# Altium PCB sitara_rev3b.PcbDoc (part 3 of 3)
Units mil, origin at the board's own origin, x right, y up, seen from the top; angles counter-clockwise.
Board outline 1650 x 2400 mil, 4 copper layers (Top Layer, Internal Plane 1, Internal Plane 2, Bottom Layer), stack 60.8 mil thick; 109 components, 83 nets, 387 pads, 306 vias.
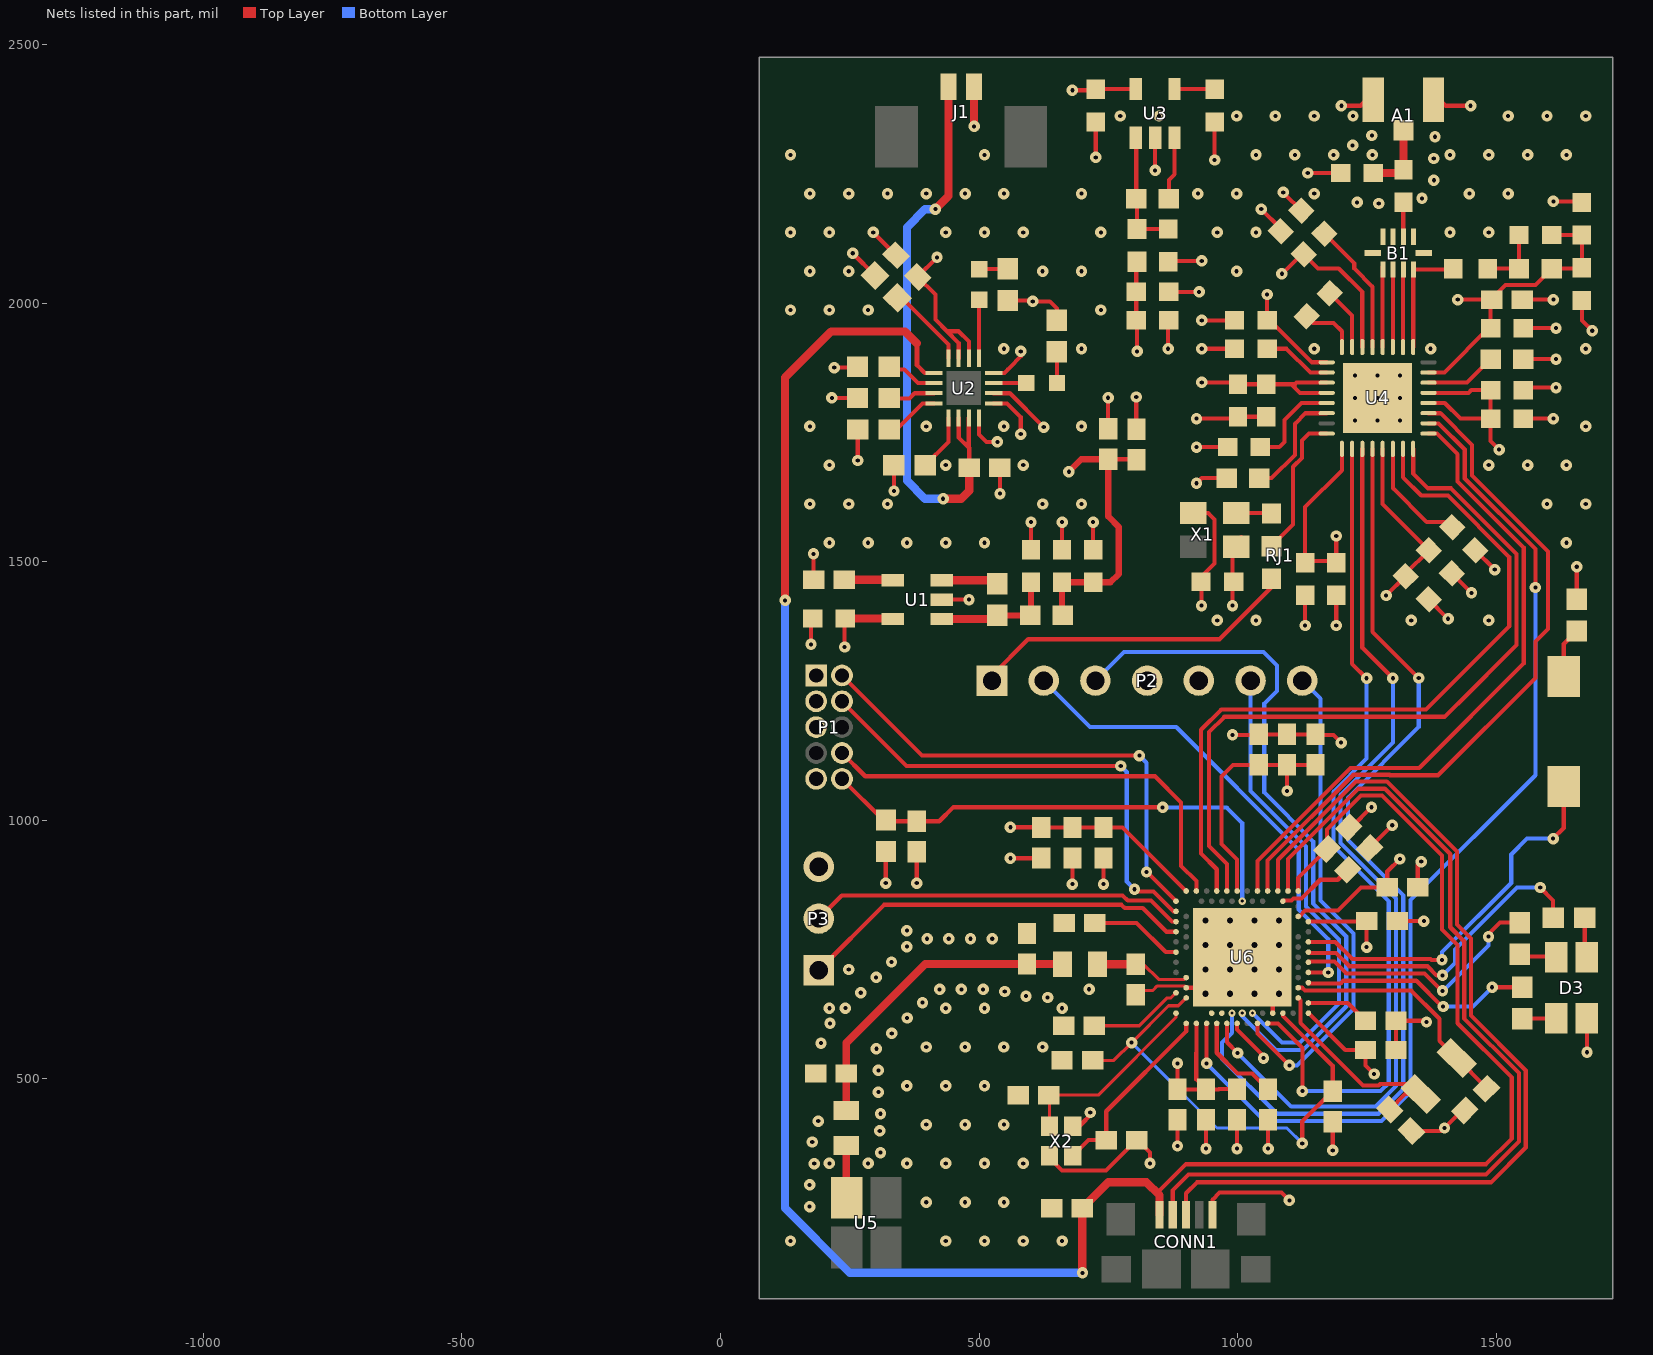
[diagram p4: the nets of this part, all layers, seen from the top]

## Via types
v1: diameter 22, hole 8, Top Layer to Bottom Layer, tented both sides, 274 vias
v2: diameter 24, hole 12, Top Layer to Bottom Layer, 16 vias
v3: diameter 19.68, hole 7.87, Top Layer to Bottom Layer, 10 vias
v4: diameter 14, hole 6, Top Layer to Bottom Layer, tented top, 4 vias
v5: diameter 113, hole 113, Top Layer to Bottom Layer, 2 vias

## Nets (pads, with @x,y where several pads share a name; then routed paths per layer and width w, separated by ;. In a path a pad name is that pad's centre, name@x,y a point inside that pad or via, vN(x,y) a via of type N, cw(c..) or ccw(c..) an arc to the next point about the centre after c; other vN are vias at no path point)
CHFILT_0: U6.B17
CHFILT_1: U4.4 U6.B15 | length 1886.1
  Top Layer w8: U4.4@1260.66,1718.07 1260.66,1364.34 v1(1350,1275)
  Bottom Layer w8: v4(989.08,626.97) 989.08,589.08 970,570 970,538.45 1075.95,432.5 1272.06,432.5 1320.22,480.67 1320.22,854.57 1213,961.8 1213,1043.4 1350,1180.4 v1(1350,1275)
CLK1: P2.1 RJ1.1 | length 637.6
  Top Layer w8: P2.1@525,1270 525,1280 595,1350 965,1350 1065.5,1450.5 RJ1.1@1065.5,1467.01
D1_N: CONN1.2 U6.AD4 | length 1850.1
  Top Layer w8: CONN1.2@874.41,237.66 874.41,284.41 905,315 1479.8,315 1544,379.2 1544,511 1438,617 1438,766.12 1411.02,793.1 1411.02,934.38 1284.4,1061 1233.36,1061 1097.35,924.99 U6.AD4@1097.35,863.19
D1_P: CONN1.3 U6.AD6 | length 1888.1
  Top Layer w8: CONN1.3@900,237.66 900,278.82 921.18,300 1490,300 1557,367 1557,516.38 1451,622.38 1451,771.51 1424.02,798.49 1424.02,939.77 1289.78,1074 1289.18,1074 1288.18,1075 1228.98,1075 1077.67,923.69 U6.AD6@1077.67,863.19
GND: A1.2 A1.3 B1.5 B1.6 B1.8 B1.9 B1.10 C1.1 C2.1 C3.1 C4.1 C5.1 C6.1 C7.1 C8.1 C9.1 C10.1 C11.1 C12.1 C13.1 C14.1 C15.1 C16.2 C17.2 C18.1 C19.2 C20.1 C21.1 C22.1 C23.2 C25.1 C26.1 C28.1 C29.1 C31.2 C32.1 C33.1 C34.2 C35.2 C36.2 C37.1 C38.2 C39.2 C40.1 C41.1 C42.1 C43.1 C44.1 C45.2 C46.1 C47.1 C48.1 C49.1 C50.2 C51.1 C52.1 C53.1 C54.1 C55.1 C56.1 C57.1 C58.1 C59.1 C60.1 C61.1 C62.1 C63.1 C64.1 C65.1 C66.1 CONN1.5 J1.2 P1.3 P1.5 P1.9 P2.5 P3.3 R3.1 R4.1 R5.1 R7.2 R8.1 R12.1 R14.1 R15.1 U1.2 U2.4 U2.6 U2.8 U3.2 U4.33 U6.74 U6.B7 U6.F23 X1.2 X2.2 X2.4 | length 5254.8
  Top Layer w6: C49.1@809.92,670.47 835.47,670.47 844.76,679.76 896.93,679.76 U6.F23@900.5,676.19
  Top Layer w8: v1(175,1340) 175,1386.5 C5.1@178.5,1390 ; v1(180,1515) 180,1465.47 C4.1@180.47,1465 ; v1(215.5,1816.5) 264.48,1816.5 R4.1@265.5,1815.48 ; v1(220,1875) 264.51,1875 R3.1@264.99,1875.48 ; v1(265.5,1695.48) R5.1@265.5,1755.48 ; v1(295.5,2136.5) C7.1@339.62,2092.38 ; R7.2@298.92,2053.07 v1(255.76,2096.24) ; R8.1@334.99,1686.5 335.5,1685.99 v1(335.5,1636.5) ; v1(379.5,878.5) C63.1@379.5,938.97 ; U1.2@427.74,1426.5 v1(480.5,1426.5) ; v1@490.11,2341.89 v1(490.5,2341.5) ; U2.4@500.03,1777.8 500.03,1745.95 514.48,1731.5 v1(535.5,1731.5) ; U2.8@528.18,1865 549.03,1865 559.5,1875.48 ; U2.6@528.33,1825.48 U2.6@528.18,1825.63 559.37,1825.63 v1(625,1760) ; C6.1@540.03,1681.5 540.5,1681.03 v1(540.5,1631.5) ; 555.1,1871.08 559.5,1875.48 ; v1(560.5,926.5) 620.03,926.5 C53.1@620.5,926.97 ; v1(580.5,1906.5) 580.5,1896.48 559.5,1875.48 ; C64.1@600.5,1523 v1(600.5,1576.5) ; X2.2@631.83,351.25 660.53,322.55 745.32,322.55 804.65,381.88 805.4,382.63 830.5,357.53 v1(830.5,336.5) ; C65.1@660.5,1523 v1(660.5,1576.5) ; C50.2@665.5,801.03 C50.2@665.97,801.5 ; v1(680.5,876.5) C57.1@680.5,926.97 ; X2.4@681.41,408.34 693.73,408.34 720.39,435 v1(715,435) ; C66.1@720.5,1523 v1(720.5,1576.5) ; v1(725.5,2281.5) C11.1@725.5,2350 C11.1@725.5,2355 ; v1(740.5,876.5) C59.1@740.5,926.97 ; C2.1@749.64,1756.89 v1(749.64,1816.86) ; C1.1@804.04,1760.42 v1(804.04,1818.32) ; v1(840.5,2256.5) U3.2@840.5,2319.26 ; v1(865.5,1911.5) 865.5,1960 C8.1@867,1961.5 ; C9.1@867,2021.5 v1(925.5,2021.5) ; C10.1@870.5,2080 872,2081.5 v1(930.5,2081.5) ; v1(883.77,370.24) C60.1@883.77,420.71 C60.1@883.77,435.71 ; U6.F23@900.5,676.19 949.71,676.19 v2(985.15,711.62) U6.74@1008.77,735.24 1067.82,676.19 U6.B7@1067.82,626.97 ; v1(920.5,1651.5) 930.5,1661.5 R12.1@979,1661.5 ; v1(920.5,1721.5) C19.2@980.5,1721.5 ; v1(920.5,1776.5) 997,1776.5 C17.2@1000.5,1780 C16.2@1055.5,1780 ; v1(930.5,1911.5) C18.1@994,1911.5 ; v1(930.5,1966.5) C20.1@994,1966.5 ; v1@933.77,370.24 v1(938.77,365.24) C41.1@938.77,420.71 C41.1@938.77,430.71 ; CONN1.5@951.18,237.66 951.18,266.18 965,280 1085,280 v1(1100,265) ; v1(955.5,2276.5) C15.1@955.5,2350 ; v1(990,1165) 1039.47,1165 C62.1@1040.5,1166.03 C58.1@1095.5,1166.03 1145,1166.03 1146.03,1165 1185,1165 v1(1200,1150) ; v1(990,1415) 990,1531.04 X1.2@1006.84,1547.88 ; v1(998.77,365.24) C61.1@998.77,400.71 ; v1(1045.5,2181.5) 1083.23,2143.77 C22.1@1083.23,2138.77 ; v1(1058.77,365.24) C38.2@1058.77,420.71 ; v1(1088,2214) C23.2@1125.96,2176.04 ; v1(1130.5,1376.5) C14.1@1130.5,1435 C14.1@1130.5,1445 ; v1(1135.5,2251.5) 1197.51,2251.5 C29.1@1199,2250 ; v1(1183.77,361.74) C37.1@1183.77,417.21 ; v1(1190.5,1376.5) C25.1@1190.5,1435 C25.1@1190.5,1445 ; v1(1200.5,2381.5) 1237.97,2381.5 A1.2@1251.47,2395 ; C56.1@1214.65,986.12 1219.65,986.12 v1(1258.77,1025.24) ; C52.1@1254.65,946.12 v1(1298.77,990.24) ; C43.1@1306.22,555.74 C42.1@1306.22,612.31 1362.69,612.31 v1(1365,610) ; C51.1@1308.77,805.24 1309.01,805 v1(1360,805) ; C40.1@1335.88,399.12 1394.12,399.12 v1(1400,405) 1434.12,439.12 C44.1@1439.12,439.12 ; C54.1@1348.3,870.24 1348.3,913.3 v1(1355,920) ; C13.1@1369.24,1427.22 v1(1406.97,1389.5) ; A1.3@1388.72,2395 1402.22,2381.5 v1(1450.5,2381.5) v1@1449,2380 ; C26.1@1414.24,1472.22 C26.1@1414.24,1477.23 v1(1451.97,1439.5) ; C28.1@1459.24,1522.22 v1(1496.97,1484.5) ; C35.2@1552,1776.5 1557,1771.5 1562,1776.5 v1(1610.5,1776.5) ; C34.2@1552,1831.5 1557,1836.5 v1(1615.5,1836.5) ; R14.1@1552,1891.5 v1(1615.5,1891.5) ; C31.2@1552,1951.5 v1(1615.5,1951.5) ; C12.1@1552,2006.5 v1(1610.5,2006.5) ; v1(1610.5,2196.5) 1663.49,2196.5 C33.1@1665.5,2194.49 ; R15.1@1655.5,1427.01 v1(1655.5,1490) ; C32.1@1665.5,2005 1670.5,2000 1665.5,1995 1665.5,1966.5 v1(1685.5,1946.5) ; v1(255.76,2096.24) 260.76,2101.24 v1(255.76,2096.24)
  Top Layer w16: v1@490.11,2341.89 490.11,2375 J1.2@490.11,2417.96
  other v1: 135.5,186.5 435.5,186.5 510.5,186.5 585.5,186.5 660.5,186.5 172.35,253.07 398,261.5 473,261.5 548,261.5 172.35,295.07 181.33,336.1 210.5,336.5 285.5,336.5 360.5,336.5 435.5,336.5 510.5,336.5 585.5,336.5 309.34,357.37 177.42,377.91 308.04,399.35 398,411.5 473,411.5 548,411.5 189.19,418.23 309.34,432.58 305.24,474.38 360.5,486.5 435.5,486.5 510.5,486.5 305.33,516.38 301.51,558.2 398,561.5 473,561.5 548,561.5 623,561.5 194.3,569.05 331.21,587.9 211.9,607.18 360.91,617.6 210.5,636.5 241.6,636.88 435.5,636.5 510.5,636.5 660.5,636.5 390.61,647.3 632.58,657.24 590.67,659.95 271.3,666.58 549.66,669.02 423.85,672.97 465.85,672.97 507.85,672.97 712.84,673.15 301,696.28 248,711.5 330.7,725.98 360.39,755.68 399.51,770.97 441.51,770.97 483.51,770.97 525.51,770.97 360.5,786.5 960.5,1386.5 1035.5,1386.5 1335.5,1386.5 1485.5,1386.5 210.5,1536.5 285.5,1536.5 360.5,1536.5 435.5,1536.5 510.5,1536.5 1635.5,1536.5 173,1611.5 248,1611.5 323,1611.5 623,1611.5 698,1611.5 1598,1611.5 1673,1611.5 210.5,1686.5 435.5,1686.5 585.5,1686.5 1485.5,1686.5 1560.5,1686.5 1635.5,1686.5 173,1761.5 398,1761.5 548,1761.5 698,1761.5 1673,1761.5 548,1911.5 698,1911.5 1148,1911.5 1373,1911.5 1673,1911.5 135.5,1986.5 210.5,1986.5 285.5,1986.5 735.5,1986.5 173,2061.5 248,2061.5 623,2061.5 698,2061.5 998,2061.5 135.5,2136.5 210.5,2136.5 435.5,2136.5 510.5,2136.5 585.5,2136.5 735.5,2136.5 960.5,2136.5 1035.5,2136.5 1410.5,2136.5 1485.5,2136.5 1272.87,2192.43 1230.92,2194.53 1356.27,2202.4 173,2211.5 248,2211.5 323,2211.5 398,2211.5 473,2211.5 548,2211.5 698,2211.5 923,2211.5 998,2211.5 1148,2211.5 1448,2211.5 1523,2211.5 1379.33,2237.5 1379.2,2279.5 135.5,2286.5 510.5,2286.5 1035.5,2286.5 1110.5,2286.5 1185.5,2286.5 1260.5,2286.5 1410.5,2286.5 1485.5,2286.5 1560.5,2286.5 1635.5,2286.5 1222.17,2304.68 1381.54,2321.43 1259.46,2324 773,2361.5 848,2361.5 998,2361.5 1073,2361.5 1148,2361.5 1223,2361.5 1523,2361.5 1598,2361.5 1673,2361.5
  other v2: 937.9,664.37 985.15,664.37 1032.39,664.37 1079.63,664.37 937.9,711.62 1032.39,711.62 1079.63,711.62 937.9,758.86 985.15,758.86 1032.39,758.86 1079.63,758.86 937.9,806.11 985.15,806.11 1032.39,806.11 1079.63,806.11
  other v3: 1227.19,1773.19 1270.5,1773.19 1313.81,1773.19 1227.19,1816.5 1270.5,1816.5 1313.81,1816.5 1227.19,1859.81 1270.5,1859.81 1313.81,1859.81
GPIO0_0: U6.B19
GPIO0_1: U4.10 U6.A20 | length 2030.3
  Top Layer w8: U6.A20@939.87,607.29 939.87,530.13 v1(940,530) ; U4.10@1368.93,1767.29 1388.21,1767.29 1439,1716.5 1439,1660.8 1575.5,1524.3 v1(1575.5,1450)
  Bottom Layer w8: v1(940,530) 1051.5,418.5 1277.86,418.5 1334.22,474.87 1334.22,845.72 1575.5,1087 v1(1575.5,1450)
LED_B: R18.2 U6.N1 | length 621.6
  Top Layer w8: U6.N1@1136.72,745.08 1138.56,743.24 1190.37,743.24 1215.84,717.77 1367.03,717.77 1384.8,700 v1(1396.11,700) ; v1(1585,870) 1609.99,845.01 R18.2@1609.99,811.5
  Bottom Layer w8: v1(1396.11,700) 1420,723.89 1420,750.2 1539.8,870 v1(1585,870)
LED_G: R17.2 U6.L1 | length 505.5
  Top Layer w8: U6.L1@1136.72,725.4 1138.04,726.71 1187.09,726.71 1210.04,703.77 1361.23,703.77 1395,670 v1(1396.11,670) ; v1(1485,775) 1485,780 1507.01,802.01 R17.2@1545.5,802.01 R17.2@1550.5,802.01
  Bottom Layer w8: v1(1396.11,670) 1397.22,670 1485,757.78 v1(1485,775)
LED_R: R16.1 U6.G1 | length 454.6
  Top Layer w8: U6.G1@1136.72,686.03 1138.04,684.71 1199.19,684.71 1204.24,689.77 1345.23,689.77 1395,640 v1(1397.22,640) v1@1397.22,637.78 ; v1(1492.01,677.01) R16.1@1550.5,677.01
  Bottom Layer w8: v1(1397.22,640) 1455,640 v1(1492.01,677.01)
MAGN_0: U6.A14 | length 88.4
  Top Layer w8: U6.A14@998.93,607.29 998.93,595.48 1050,544.41 v1(1050,540)
MAGN_1: U4.3 U6.A16 | length 1773.8
  Top Layer w8: U6.A16@979.24,607.29 979.24,570.76 v1(1000,550) ; U4.3@1240.97,1718.07 1240.97,1333.56 v1(1300,1274.53)
  Bottom Layer w8: v1(1000,550) 1103.5,446.5 1266.26,446.5 1306.22,486.46 1306.22,848.78 1199,956 1199,1049.2 1300,1150.2 v1(1300,1274.53)
NetA1_1: A1.1 C27.2 C29.2 | length 137
  Top Layer w15: C29.2@1262,2251.5 C27.2@1314,2251.5 ; C27.2@1320.5,2258 A1.1@1320.5,2333.83
  Top Layer w22.84: C27.2@1314,2251.5 C27.2@1320.5,2258
NetB1_1: B1.1 U4.20 | length 165.1
  Top Layer w8: U4.20@1280.34,1914.93 1280.34,2070 B1.1@1280.36,2065 ; B1.1@1280.93,2065 B1.1@1280.97,2070
NetB1_2: B1.2 U4.19 | length 151
  Top Layer w8: U4.19@1300.03,1914.93 1300.03,2064.37 B1.2@1300.66,2065 ; B1.2@1300.03,2069.37 B1.2@1300.03,2070
NetB1_3: B1.3 U4.18 | length 158.7
  Top Layer w8: U4.18@1319.71,1914.93 1319.71,2064.37 B1.3@1320.34,2065 B1.3@1320.34,2056.66
NetB1_4: B1.4 L1.2 U4.17 | length 228.2
  Top Layer w8: U4.17@1339.4,1914.93 1339.4,2064.37 B1.4@1340.03,2065 1415.74,2065 L1.2@1417.23,2066.5
NetB1_7: B1.7 C27.1 | length 57.1
  Top Layer w9: B1.7@1320.34,2133 1320.34,2188.35 C27.1@1320.34,2189.85
  Top Layer w16.4: C27.1@1320.34,2188.35 C27.1@1320.5,2188.51
NetC4_2: C4.2 U1.4 | length 94.2
  Top Layer w8: U1.4@332.16,1465 U1.4@333.26,1463.9
  Top Layer w16: C4.2@239.53,1465 U1.4@332.16,1465
NetC6_2: C6.2 J1.1 U2.2 U2.3 | length 1145.2
  Top Layer w8: U2.2@460.66,1777.8 460.66,1739.93 480.11,1720.48 ; U2.3@480.11,1777.56 480.11,1720.48 ; C6.2@480.97,1690.48 480.97,1719.61 480.11,1720.48
  Top Layer w16: v1(415.5,2181.5) 440.89,2206.89 J1.1@440.89,2417.96 ; v1(430.5,1621.5) 465.5,1621.5 480.97,1636.97 C6.2@480.97,1681.5
  Bottom Layer w16: v1(415.5,2181.5) 395.5,2181.5 360.5,2146.5 360.5,1656.5 395.5,1621.5 v1(430.5,1621.5)
NetC10_2: C10.2 FB1.2 R11.2 U3.1 | length 227.3
  Top Layer w8: U3.1@803.1,2319.26 U3.1@804,2318.35 ; U3.1@804,2303.35 804,2206.5 805.5,2205 805.5,2186.5 FB1.2@805.5,2143 C10.2@865.5,2143 C10.2@870.5,2143
NetC15_2: C15.2 U3.4 | length 77.9
  Top Layer w8: U3.4@877.9,2413.74 954.75,2413.74 C15.2@955.5,2413
NetC18_2: C18.2 U4.26 | length 134
  Top Layer w8: C18.2@1057,1911.5 1094.71,1911.5 1140.5,1865.71 U4.26@1172.07,1865.71
NetC19_1: C19.1 U4.29 | length 188.7
  Top Layer w8: C19.1@1043.49,1721.5 1080.5,1721.5 1090.5,1731.5 1090.5,1773.87 1123.28,1806.66 U4.29@1172.07,1806.66
NetC23_1: C23.1 U4.21 | length 257.8
  Top Layer w8: C23.1@1167.77,2134.23 1225.5,2076.5 1225.5,2066.5 1260.66,2031.34 U4.21@1260.66,1914.93
NetC24_1: C24.1 U4.23 | length 132.1
  Top Layer w8: C24.1@1167.77,2018.77 C24.1@1177.77,2018.77 1178.23,2018.77 1221.29,1975.71 U4.23@1221.29,1914.93
NetC24_2: C24.2 U4.24 | length 120.8
  Top Layer w8: C24.2@1123.23,1974.23 C24.2@1133.23,1974.23 1145.96,1961.5 1185.5,1961.5 1201.6,1945.4 U4.24@1201.6,1914.93
NetC28_2: C28.2 U4.6 | length 221.9
  Top Layer w8: U4.6@1300.03,1718.07 1300.03,1641.97 1365.5,1576.5 1404.97,1576.5 C28.2@1414.7,1566.77
NetC30_2: C30.2 L1.1 R13.2 | length 125.2
  Top Layer w8: L1.1@1483.77,2066.5 R13.2@1544,2066.5 C30.2@1544,2131.5
NetC36_1: C36.1 U6.A23 X2.3 | length 366.9
  Top Layer w8: X2.3@681.41,351.25 711.66,381.5 C36.1@745.97,381.5 745.97,437.44 900.5,591.97 U6.A23@900.5,607.29
NetC37_2: C37.2 C45.1 U6.B5 U6.D23 | length 957.6
  Top Layer w6: C45.1@719.53,535.69 760.7,535.69 v1(795,569.98) 866.4,641.39 885.39,641.39 U6.D23@900.5,656.5
  Top Layer w8: U6.B5@1087.51,626.97 1087.51,621.5 1183.77,525.24 C37.2@1183.77,476.27 1124.77,417.27 v1(1124.77,375.19)
  Bottom Layer w6: v1(795,569.98) 959.98,405 1094.95,405 v1(1124.77,375.19)
NetC38_1: C38.1 U6.A18 | length 185.3
  Top Layer w8: U6.A18@959.56,607.29 959.56,550.44 999.56,510.44 1028.1,510.44 C38.1@1058.77,479.77
NetC39_1: C39.1 U6.B24 X2.1 | length 376.8
  Top Layer w6: X2.1@636.13,408.34 636.13,467.49 C39.1@635.03,468.59 730.5,468.59 880.81,618.9 U6.B24@880.81,626.97
NetC40_2: C40.2 U6.D2 X3.1 | length 413.7
  Top Layer w8: U6.D2@1117.04,656.5 1121.61,651.93 1121.61,608.39 1242.59,487.41 1272.88,487.41 1275.47,490 1334.41,490 X3.1@1353.97,470.44 1323.68,470.44 C40.2@1294.12,440.88
NetC42_2: C42.2 U6.C1 | length 124.7
  Top Layer w8: U6.C1@1136.72,646.66 1212.82,646.66 C42.2@1247.17,612.31
NetC44_2: C44.2 U6.F2 X3.2 | length 470.7
  Top Layer w8: U6.F2@1117.04,676.19 1124.77,676.19 1130.34,670.61 1335.5,670.61 1387,619.11 1390,616.11 1390,573.61 X3.2@1423.57,540.04 1480.88,482.73 C44.2@1480.88,480.88
NetC46_2: C46.2 U6.E24 | length 184.3
  Top Layer w6: C46.2@722.89,602.78 809.92,602.78 863.63,656.5 870.97,656.5 U6.E24@880.81,666.34
NetC47_2: C47.2 C48.2 L2.2 L3.1 | length 611.8
  Top Layer w15: L3.1@243.38,438.86 243.31,438.94 C48.2@243.31,510.44 243.31,569.29 395.99,721.97 C47.2@592.65,721.97 L2.2@661.18,721.97
  Top Layer w16.8: L2.2@661.18,721.97 L2.2@661.33,721.83
NetC49_2: C49.2 L2.1 U6.H23 | length 185.2
  Top Layer w6: C49.2@803.1,721.83 817.62,721.83 847.15,692.3 896.93,692.3 U6.H23@900.5,695.87
  Top Layer w16.8: L2.1@729.04,721.83 C49.2@803.1,721.83
NetC50_1: C50.1 U6.N24 | length 180.4
  Top Layer w8: C50.1@723.76,801.5 804.53,801.5 860.94,745.08 U6.N24@880.81,745.08
NetC52_2: C52.2 U6.AC5 | length 150.6
  Top Layer w8: U6.AC5@1087.51,843.51 1089.01,845.01 1104.2,845.01 1107.97,848.78 1123.5,848.78 1159.72,885 1193.53,885 C52.2@1212.89,904.36
NetC64_2: C64.2 FB2.2 R1.2 U1.1 | length 238.4
  Top Layer w8: R1.2@528.61,1389.1 R1.2@535.5,1395.99 ; FB2.2@598.49,1395.99 FB2.2@599,1396.5 FB2.2@600.5,1398
  Top Layer w12: R1.2@535.5,1395.99 FB2.2@598.49,1395.99 ; FB2.2@600.5,1398 C64.2@600.5,1460
  Top Layer w16: U1.1@427.74,1389.1 R1.2@528.61,1389.1
NetD1_1: D1.1 R9.1 | length 55.2
  Top Layer w8: D1.1@500.5,2065.48 554.99,2065.48 R9.1@555.5,2065.99
NetD1_2: D1.2 U2.9 | length 118.5
  Top Layer w8: U2.9@500.03,1893.15 500.03,2005.95 D1.2@500.5,2006.42 D1.2@500.5,2011.42
NetD2_1: D2.1 R10.1 | length 54.5
  Top Layer w8: D2.1@650.5,1850.48 R10.1@650.5,1904.96
NetD2_2: D2.2 U2.7 | length 67.3
  Top Layer w8: U2.7@528.18,1845.32 591.45,1845.32 D2.2@595.5,1845.32
NetD3_1: D3.1 R16.2 | length 65.4
  Top Layer w8: R16.2@1551.01,616.5 1615.03,616.5 D3.1@1615.97,617.44
NetD3_3: D3.3 R18.1 | length 77.6
  Top Layer w8: R18.1@1671.01,811.5 1671.01,739.57 D3.3@1675.03,735.56
NetD3_4: D3.4 R17.1 | length 75.2
  Top Layer w8: R17.1@1541.96,735.56 1542.9,736.5 1614,736.5 1614.52,737.01 D3.4@1615.97,735.56
NetL3_2: L3.2 U5.1 | length 101.4
  Top Layer w15: U5.1@243.38,270.63 L3.2@243.38,371.14
  Top Layer w38: U5.1@243.38,270.63 U5.1@244.02,270
NetR1_1: R1.1 U1.3 | length 110.6
  Top Layer w8: R1.1@528.61,1463.9 R1.1@535.5,1457.01
  Top Layer w16: U1.3@427.74,1463.9 R1.1@528.61,1463.9
NetR3_2: R3.2 U2.14 | length 103.2
  Top Layer w8: R3.2@329.48,1876.5 R3.2@326.01,1876.5 331.01,1871.5 355.5,1871.5 381.68,1845.32 U2.14@412.82,1845.32
NetR4_2: R4.2 U2.15 | length 86
  Top Layer w8: R4.2@331.01,1815.48 365.5,1815.48 375.66,1825.63 U2.15@412.82,1825.63
NetR5_2: R5.2 U2.16 | length 102.2
  Top Layer w8: R5.2@326.52,1755.48 R5.2@335.5,1755.48 ; R5.2@340.5,1755.48 390.97,1805.95 U2.16@412.82,1805.95
NetR7_1: R7.1 U2.12 | length 147.5
  Top Layer w8: R7.1@355.5,2004.96 356.01,2004.96 440.97,1920 U2.12@440.97,1893.15
NetR8_2: R8.2 U2.1 | length 109.9
  Top Layer w8: R8.2@396.01,1686.5 440.97,1731.46 U2.1@440.97,1777.8
NetR11_1: R11.1 U3.3 | length 117.3
  Top Layer w8: R11.1@867,2206.5 867,2238 877.9,2248.9 U3.3@877.9,2319.26
NetR12_2: R12.2 U4.30 | length 217.2
  Top Layer w8: R12.2@1042,1661.5 1065.5,1661.5 1110.5,1706.5 1110.5,1766.5 1130.97,1786.97 U4.30@1172.07,1786.97
NetR14_2: R14.2 U4.14 | length 138.9
  Top Layer w8: U4.14@1368.93,1846.03 1443.53,1846.03 R14.2@1489,1891.5
NetR15_2: R15.2 SW1.1 | length 98.5
  Top Layer w8: SW1.1@1630.5,1277.8 1630.5,1340.99 R15.2@1655.5,1365.99
NetRJ1_2: RJ1.2 U4.32 | length 281.7
  Top Layer w8: RJ1.2@1065.5,1530 1107.19,1571.69 1107.19,1683.39 1124.5,1700.7 1124.5,1734.1 1138,1747.6 U4.32@1172.07,1747.6
NetRJ1_3: RJ1.3 X1.3 | length 69.1
  Top Layer w8: X1.3@996.84,1593.98 1064.51,1593.98 RJ1.3@1065.5,1592.99
NetSW1_2: SW1.2 U6.R1 | length 735
  Top Layer w8: U6.R1@1136.72,764.77 1188.64,764.77 1221.64,731.77 1372.83,731.77 1374.6,730 v1(1395,730) ; v1(1610,964.5) 1630.5,985 SW1.2@1630.5,1065.2
  Bottom Layer w8: v1(1395,730) 1395,745 1529,879 1529,934 1559.5,964.5 v1(1610,964.5)
RESET: C63.2 P1.10 R19.2 U6.AC13 | length 983
  Top Layer w8: P1.10@235,1080 315.99,999.01 319.5,999.01 320.48,998.03 C63.2@379.5,998.03 423.03,998.03 450.24,1025.24 854.76,1025.24 v1(855,1025)
  Bottom Layer w8: v1(855,1025) 978.77,1025 1008.77,995 v4(1008.77,843.51)
RST_N: U4.2 U6.A8 | length 1652.6
  Top Layer w8: U6.A8@1057.98,607.29 1077.71,607.29 1125,560 v1(1125,476.27) ; U4.2@1221.29,1718.07 1221.29,1302.48 v1(1249.24,1274.53)
  Bottom Layer w8: v1(1125,476.27) 1276.23,476.27 1292.22,492.26 1292.22,842.98 1185,950.2 1185,1055 1249.24,1119.24 v1(1249.24,1274.53)
SPI0_CS: P2.7 U6.A10 | length 951.8
  Top Layer w8: U6.A10@1038.3,607.29 1038.3,587.71 v1(1100,526)
  Bottom Layer w8: v1(1100,526) 1114.69,526 1224,635.32 1224,781 1160,845 1160,1235 P2.7@1125,1270
SPI0_MISO: P2.6 U6.B11 | length 917.7
  Bottom Layer w8: P2.6@1025,1270 1025,1056.5 1132,949.5 1132,833.4 1196,769.4 1196,645.5 1120.5,570 1085.43,570 v4(1028.45,626.97)
SPI0_MOSI: P2.2 U6.J1 | length 928
  Top Layer w8: U6.J1@1136.72,705.71 v1(1175,705.71)
  Bottom Layer w8: P2.2@625,1270 714.6,1180.4 881.3,1180.4 1118,943.7 1118,827.6 1175,770.6 v1(1175,705.71)
SPI0_SCLK: P2.3 U6.B13 | length 1388.3
  Bottom Layer w8: P2.3@725,1270 780,1325 1050,1325 1075.95,1299.05 1075.95,1250 1051.5,1225.55 1051.5,1053.37 1146,958.87 1146,839.2 1210,775.2 1210,639.7 1126.3,556 1074,556 1008.77,621.23 v4(1008.77,626.97)
SPI1_CS: U4.11 U6.AD8 | length 1354.8
  Top Layer w8: U6.AD8@1057.98,863.19 1057.98,922.39 1223.59,1088 1293.57,1088 1294.57,1087 1387.5,1087 1575.5,1275 1575.5,1345.5 1600,1370 1600,1519.6 1453,1666.6 1453,1725.77 1391.8,1786.97 U4.11@1368.93,1786.97
SPI1_MISO: U4.9 U6.AD10 | length 1261.3
  Top Layer w8: U6.AD10@1038.3,863.19 1038.3,921.34 1217.95,1101 1351,1101 1553,1303 1553,1527 1425,1655 1425,1707.75 1385.15,1747.6 U4.9@1368.93,1747.6
SPI1_MOSI: U4.7 U6.AD18 | length 1461
  Top Layer w8: U6.AD18@959.56,863.19 959.56,905.24 929.38,935.41 929.38,1175 968.38,1214 1364,1214 1525,1375 1525,1509.24 1406.47,1627.77 1355,1627.77 1319.71,1663.06 U4.7@1319.71,1718.07
SPI1_SCLK: U4.8 U6.AD16 | length 1473.7
  Top Layer w8: U6.AD16@979.24,863.19 979.24,915.32 944.59,949.97 944.59,1170.41 974.18,1200 1400,1200 1425,1225 1425.5,1225 1539,1338.5 1539,1515.04 1412.27,1641.77 1368.23,1641.77 1339.4,1670.6 U4.8@1339.4,1718.07
SWDCLK: P1.4 U6.AA24 | length 935.9
  Top Layer w8: P1.4@235,1230 360,1105 v1(774.02,1105) ; v1(800.5,866.5) 804.94,862.06 837.44,862.06 875.68,823.82 U6.AA24@880.81,823.82
  Bottom Layer w8: P1.4@235,1230 P1.4@245,1230 ; v1(774.02,1105) 785.5,1093.52 785.5,881.5 791.77,875.23
SWDIO: P1.2 U6.AC24 | length 951.1
  Top Layer w8: P1.2@235,1280 390,1125 v1(810,1125) ; v1(823.77,900) 823.77,900.56 U6.AC24@880.81,843.51
  Bottom Layer w8: v1(810,1125) 823.77,1111.23 v1(823.77,900)
SWO: P1.8 U6.AD22 | length 878.7
  Top Layer w8: P1.8@235,1130 280,1085 840,1085 890.5,1034.5 890.5,911.89 920.19,882.21 U6.AD22@920.19,863.19
UART_RX: P3.2 U6.W24 | length 730.1
  Top Layer w8: P3.2@190,810 234.5,854.5 777.5,854.5 787.5,844.5 832.5,844.5 872.86,804.14 U6.W24@880.81,804.14
UART_TX: P3.1 U6.U24 | length 764.8
  Top Layer w8: P3.1@190,710 316.5,836.5 775.7,836.5 781.7,830.5 816.5,830.5 862.55,784.45 U6.U24@880.81,784.45
VBUS: C3.2 C56.2 CONN1.1 U2.13 U6.AD2 | length 4723.6
  Top Layer w8: 380,1880 395,1865 U2.13@412.82,1865 ; 848.82,283.82 900,335 1480,335 1530,385 1530,502.57 1425,607.57 1425,758.57 1395,788.57 1395,932.01 1279.01,1048 1238.74,1048 1172.89,982.14 C56.2@1172.89,944.36 1117.04,888.51 U6.AD2@1117.04,863.19
  Top Layer w10: 380,1880 380,1922
  Top Layer w16: v1(125,1425) 125,1856 214,1945 357,1945 380,1922 ; v1(700,125) 699.53,125.47 C3.2@699.53,250 749.53,300 823.82,300 848.82,275 CONN1.1@848.82,237.66
  Bottom Layer w16: v1(125,1425) 125,250 250,125 v1(700,125)
VCC: C1.2 C2.2 C7.2 C65.2 C66.2 FB2.1 R9.2 R10.2 U2.5 U2.10 U2.11 | length 1109.7
  Top Layer w8: v1(418.77,2088.23) 381.38,2050.84 C7.2@381.38,2050.62 415.5,2016.5 415.5,1968.1 438.13,1945.48 ; U2.11@460.66,1893.15 460.66,1922.95 438.13,1945.48 ; U2.10@480.34,1893.15 480.34,1925.32 460.18,1945.48 438.13,1945.48 ; U2.5@528.18,1805.95 554.05,1805.95 580.5,1779.5 v1(580.5,1746.5) ; R9.2@555.5,2004.96 602.04,2004.96 v1(603.77,2003.23) 636.77,2003.23 650.5,1989.5 R10.2@650.5,1967.01 ; FB2.1@660.5,1398 FB2.1@662,1396.5 ; C2.2@749.64,1697.83 C1.2@812.1,1697.83 ; C1.2@813.37,1696.56 C1.2@812.1,1697.83 ; C1.2@814.64,1697.83 C1.2@812.1,1697.83
  Top Layer w12: FB2.1@660.5,1398 C65.2@660.5,1460 C66.2@720.5,1460 754,1460 770,1476 770,1567 749.64,1587.36 C2.2@749.64,1697.83 697.69,1697.83 v1(673.58,1673.72)
VCC_RDO: C11.2 C12.2 C13.2 C14.2 C16.1 C17.1 C20.2 C21.2 C22.2 C25.2 C26.2 C30.1 C31.1 C32.2 C33.2 C34.1 C35.1 R13.1 U3.5 U4.1 U4.5 U4.12 U4.13 U4.15 U4.22 U4.25 U4.27 U4.28 X1.4 | length 2869.2
  Top Layer w8: v1(680.5,2411.5) 724,2411.5 C11.2@725.5,2413 ; C11.2@725.5,2413.74 U3.5@803.1,2413.74 ; X1.4@914.16,1593.98 943.02,1593.98 955.5,1581.5 955.5,1496.15 920.85,1461.5 930,1452.35 v1(930,1415) ; v1(930.5,1846.5) 997,1846.5 C17.1@1000.5,1843 C16.1@1055.5,1843 1103.69,1843 ; v1(1057,2016.5) 1060.5,2013 1057,2009.49 C20.2@1057,1966.5 1062.34,1966.5 1143.44,1885.4 U4.25@1172.07,1885.4 ; v1(1085.5,2056.5) 1123.23,2094.23 C22.2@1127.77,2094.23 1155.5,2066.5 1195.5,2066.5 1240.97,2021.03 U4.22@1240.97,1914.93 ; U4.28@1172.07,1826.34 1120.34,1826.34 1103.69,1843 ; U4.27@1172.07,1846.03 1113.53,1846.03 1110.5,1843 1103.69,1843 ; C25.2@1190.5,1498 C25.2@1190.5,1508 ; v1(1190.5,1549.5) C25.2@1190.5,1508 ; U4.1@1201.6,1718.07 1201.6,1676.6 1130.5,1605.5 1130.5,1501.5 1184,1501.5 C25.2@1190.5,1508 ; U4.5@1280.34,1718.07 1280.34,1611.13 C26.2@1369.7,1521.77 1324.7,1476.77 C13.2@1324.7,1471.77 1324.24,1471.77 v1(1286.97,1434.5) ; U4.12@1368.93,1806.66 1400.34,1806.66 1430.5,1776.5 C35.1@1489,1776.5 ; U4.13@1368.93,1826.34 1446.47,1826.34 1451.63,1831.5 C34.1@1489,1831.5 C35.1@1489,1776.5 ; U4.15@1368.93,1865.71 1399.71,1865.71 C31.1@1487.25,1953.25 ; v1(1425.5,2006.5) C12.2@1489,2006.5 ; C31.1@1489,1951.5 C12.2@1489,2006.5 ; v1(1505.5,1716.5) 1489,1733 C35.1@1489,1776.5 ; C30.1@1607,2131.5 C33.2@1665.5,2131.5 1665.5,2073 C32.2@1664,2071.5 ; C32.2@1665.5,2068 1664,2066.5 R13.1@1607,2066.5 1575.5,2035 1517.5,2035 C12.2@1489,2006.5
VDD: C5.2 C8.2 C9.2 C41.2 C43.2 C51.2 C53.2 C54.2 C55.2 C57.2 C58.2 C59.2 C60.2 C61.2 C62.2 D3.2 FB1.1 P1.1 P2.4 R19.1 U1.5 U6.A22 U6.AD14 U6.AD23 U6.B1 U6.W1 U6.Y2 | length 2235.7
  Top Layer w8: v1(240,1335) 240,1388.5 C5.2@241.5,1390 ; v1(319.5,878.5) R19.1@319.5,937.99 ; U1.5@332.35,1390 U1.5@333.26,1389.1 ; v1(560.5,986.5) 615.03,986.5 C53.2@620.03,981.5 ; C53.2@620.5,986.03 C57.2@680.5,986.03 735.5,986.03 C59.2@740.5,981.03 ; C59.2@740.5,986.03 777.67,986.03 U6.AD23@900.5,863.19 ; v1(805.5,1906.5) 805.5,1960 804,1961.5 C8.2@804,1966.5 C9.2@804,2021.5 804,2078.51 FB1.1@805.5,2080 ; v1(883.77,530) C60.2@883.77,479.77 C41.2@938.77,479.77 ; U6.A22@920.18,607.29 920.18,550.24 920,550.06 920,498.54 C41.2@938.77,479.77 ; C61.2@998.77,479.77 998.3,480.24 963.77,480.24 963.3,479.77 C41.2@938.77,479.77 ; U6.AD14@998.93,863.19 998.93,923.77 968.77,953.93 968.77,1084.77 990.97,1106.97 C62.2@1040.5,1106.97 C58.2@1095.5,1106.97 ; v1(1095.5,1056.5) C58.2@1095.5,1106.97 ; U6.Y2@1117.04,813.98 1119.15,813.98 1130.41,825.24 1193.77,825.24 1238.77,870.24 C54.2@1289.24,870.24 1289.24,900.71 v1(1313.53,925) ; U6.B1@1136.72,626.97 1207.95,555.74 C43.2@1247.17,555.74 1247.17,526 v1(1263.77,509.41) ; U6.W1@1136.72,804.14 1136.82,804.24 1198.71,804.24 1198.81,804.14 1247.67,804.14 C51.2@1248.77,805.24 ; C55.2@1150.5,1106.97 C58.2@1095.5,1106.97 ; v1(1249.24,754.77) C51.2@1249.24,805.24 ; D3.2@1675.03,617.44 1675.5,616.97 v1(1675.5,551.5)
  Top Layer w16: C5.2@241.5,1390 U1.5@332.35,1390
pads on no net: CONN1.0 CONN1.4 J1.3 J1.4 P1.6 P1.7 RJ1.5 U2.17 U4.16 U4.31 U5.2 U5.3 U5.4 U6.A12 U6.AB2 U6.AC9 U6.AC11 U6.AC15 U6.AC17 U6.AC19 U6.AC21 U6.AD12 U6.AD20 U6.B3 U6.B9 U6.H2 U6.J24 U6.K2 U6.L24 U6.M2 U6.P2 U6.P23 U6.R24 U6.T2 U6.T23 U6.U1 U6.V23 U6.Y23 X1.1 X1.5
copper on no net:
  other v3: 470.5,1835.48
  other v5: 1590.5,216.5 215.5,2341.5

## Polygon pours and split planes (outlines as drawn)
GND on Bottom Layer "GND_L04_P036" (solid, remove dead copper, pour order 36): 670,2445 670,2120 920,2120 920,1370 1695,1370 1695,2445
GND on Bottom Layer "GND_L04_P034" (solid, remove dead copper, pour order 34): 105,2445 630,2445 630,2080 755,2080 755,1445 105,1445
GND on Bottom Layer "GND_L04_P040" (solid, remove dead copper, pour order 40): 850,825 850,105 105,105 105,825
GND on Top Layer "GND_L01_P032" (solid, remove dead copper, pour order 32): 670,2445 670,2120 920,2120 920,1370 1695,1370 1695,2445
GND on Top Layer "GND_L01_P030" (solid, remove dead copper, pour order 30): 105,2445 630,2445 630,2080 755,2080 755,1445 105,1445
GND on Top Layer "GND_L01_P038" (solid, remove dead copper, pour order 38): 743.34,825 743.34,105 105,105 105,825
GND on Internal Plane 1 (split plane): 1704.9,95.1 95.1,95.1 95.1,2454.9 1704.9,2454.9
VCC_RDO on Internal Plane 2 (split plane): 1704.9,1360.09 910.09,1360.09 910.09,2100 909.74,2102.61 908.73,2105.04 907.13,2107.13 905.04,2108.73 902.61,2109.74 900,2110.09 660.09,2110.09 660.09,2454.9 1704.9,2454.9
VDD on Internal Plane 2 (split plane): 889.91,1350 890.26,1347.39 891.27,1344.96 892.87,1342.87 894.96,1341.26 897.39,1340.26 900,1339.91 1704.9,1339.91 1704.9,95.1 95.1,95.1 95.1,1414.91 775,1414.91 777.61,1415.26 780.04,1416.27 782.13,1417.87 783.74,1419.96 784.74,1422.39 785.09,1425 785.09,2089.91 889.91,2089.91
VCC on Internal Plane 2 (split plane): 639.91,2100 640.26,2097.39 641.26,2094.96 642.87,2092.87 644.96,2091.27 647.39,2090.26 650,2089.91 764.91,2089.91 764.91,1435.09 95.1,1435.09 95.1,2454.9 639.91,2454.9

## Keep-outs
Top Layer:
  region: 1260.47,2430 1379.72,2430 1379.72,2375.83 1260.47,2375.83
Internal Plane 1:
  rectangle: 660.5,635 665,650
Keep-Out Layer:
  the board outline again, w10

## Other copper
Bottom Layer:
  pour cut-out: -1239.5,2261.5
  pour cut-out: -1239.5,2261.5
Internal Plane 1 (plane layer: these items are gaps in the copper):
  pour cut-out: 233.87,1080 233.87,1280 185,1280 185,1080
Internal Plane 2 (plane layer: these items are gaps in the copper):
  pour cut-out: 233.87,1080 233.87,1280 185,1280 185,1080
  pour cut-out: 105,105 675,105 675,175 850,175 850,825 105,825
  lines w20: 75,1425 775,1425 775,2100 ; 650,2475 650,2100 775,2100 ; 1725,1350 900,1350 900,2100 775,2100

## Silkscreen, mask and mechanical layers (free items; w line width, h text height)
Top Overlay:
  drawing of 818 lines, arcs and shapes, not listed
  text "Greg, Gov., Anh" at 1075,225 h60
  text "Sitara Rev.3" at 1075,175 h60
  text "07/10/2018" at 1075,125 h60
  text "AL" at 1650,100 h40
Mechanical 3:
  the board outline again, w10
Mechanical 14:
  circle w37.5: c215.5,2341.5 r56.5
  circle w37.5: c1590.5,216.5 r56.5
  lines w40: 0,0 1806,0 1806,2558 0,2558 0,0

## Dimensions
75,75 to 1725,75 on Mechanical 1
75,75 to 75,2475 on Mechanical 1